# Altium PCB 0402保留.PcbDoc
Units mm, origin at the board's own origin, x right, y up, seen from the top; angles counter-clockwise.
Board outline 60.91 x 50 mm, 2 copper layers (Top Layer, Bottom Layer); 105 components, 73 nets, 380 pads, 0 vias.
Unrouted connection lines stored in the file: 234.
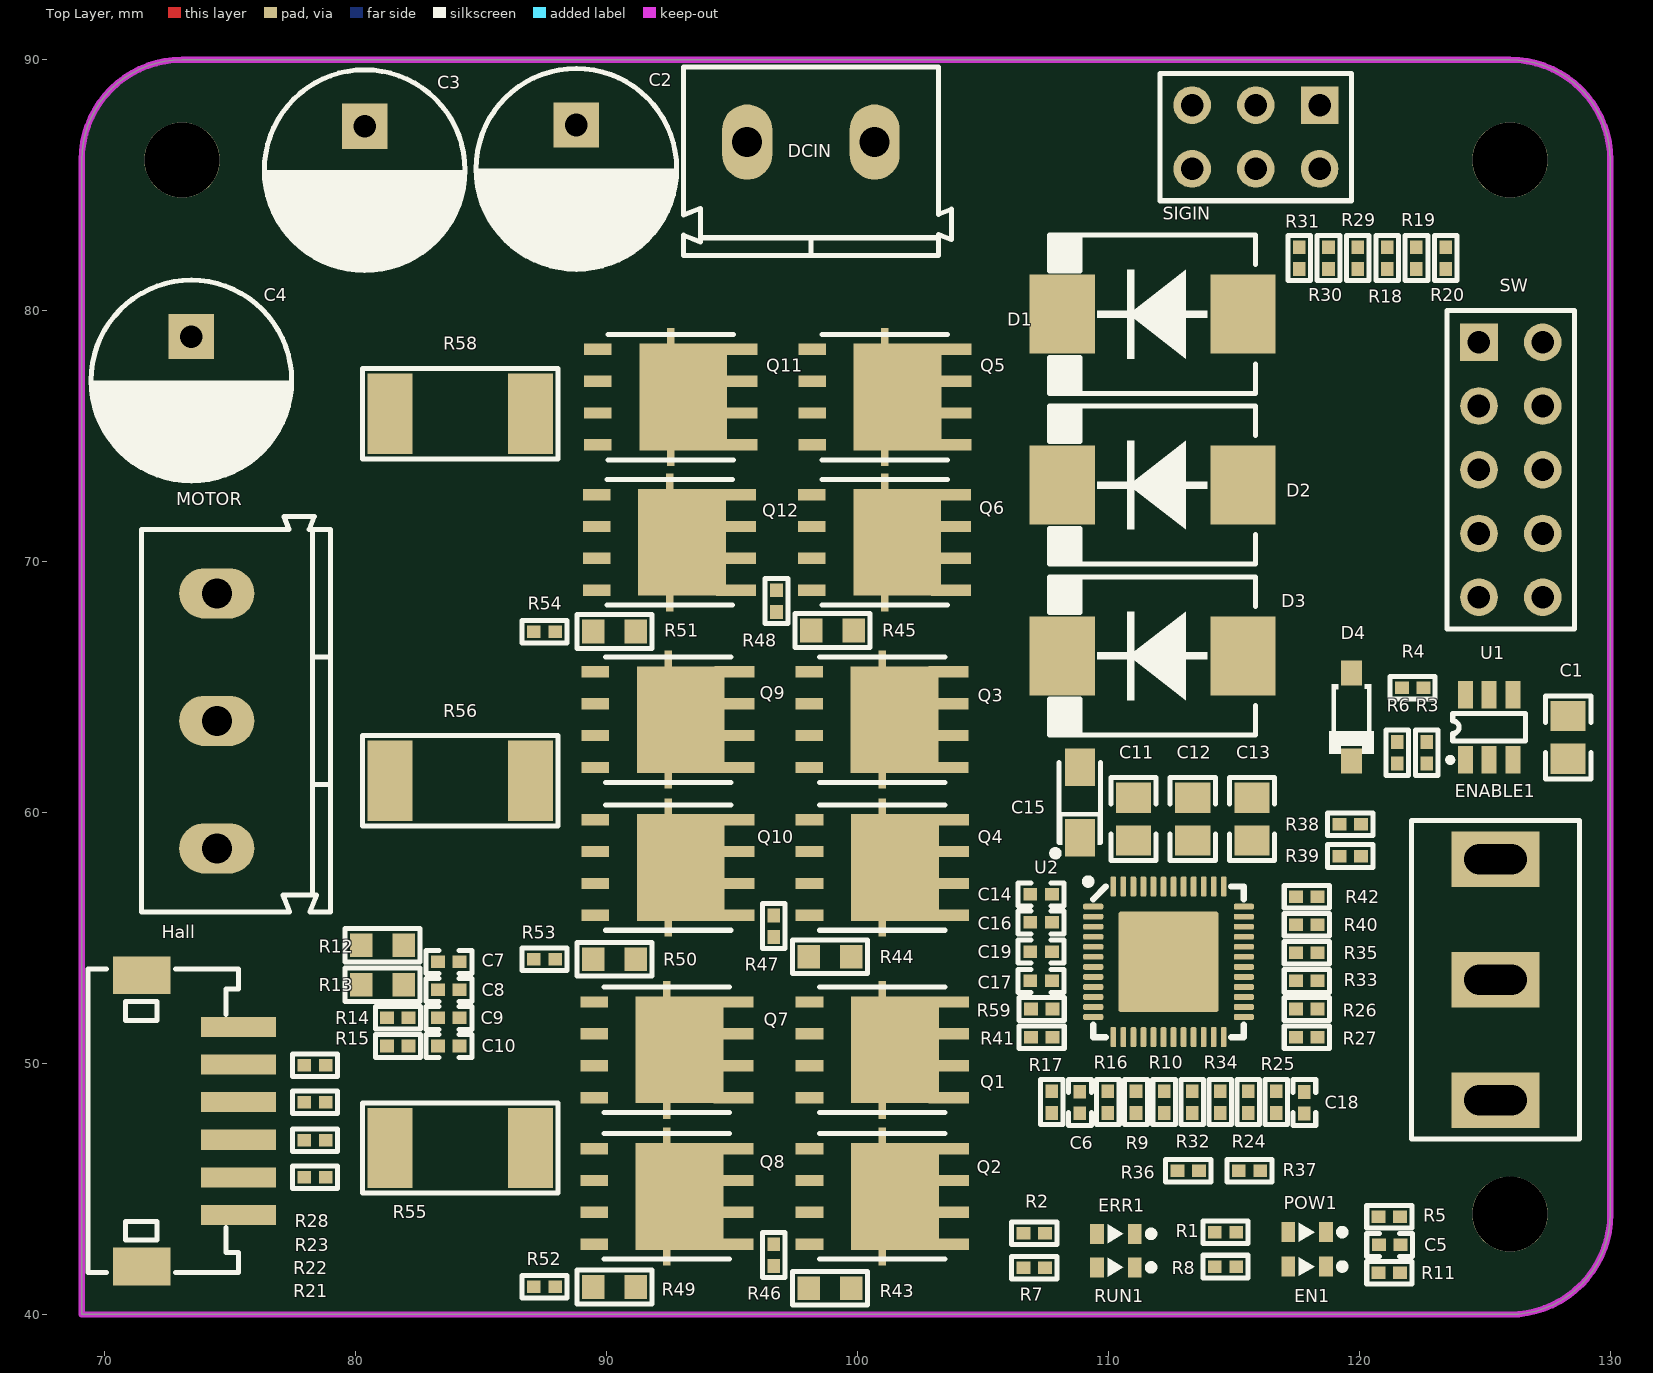
[diagram p0: Top Layer view]
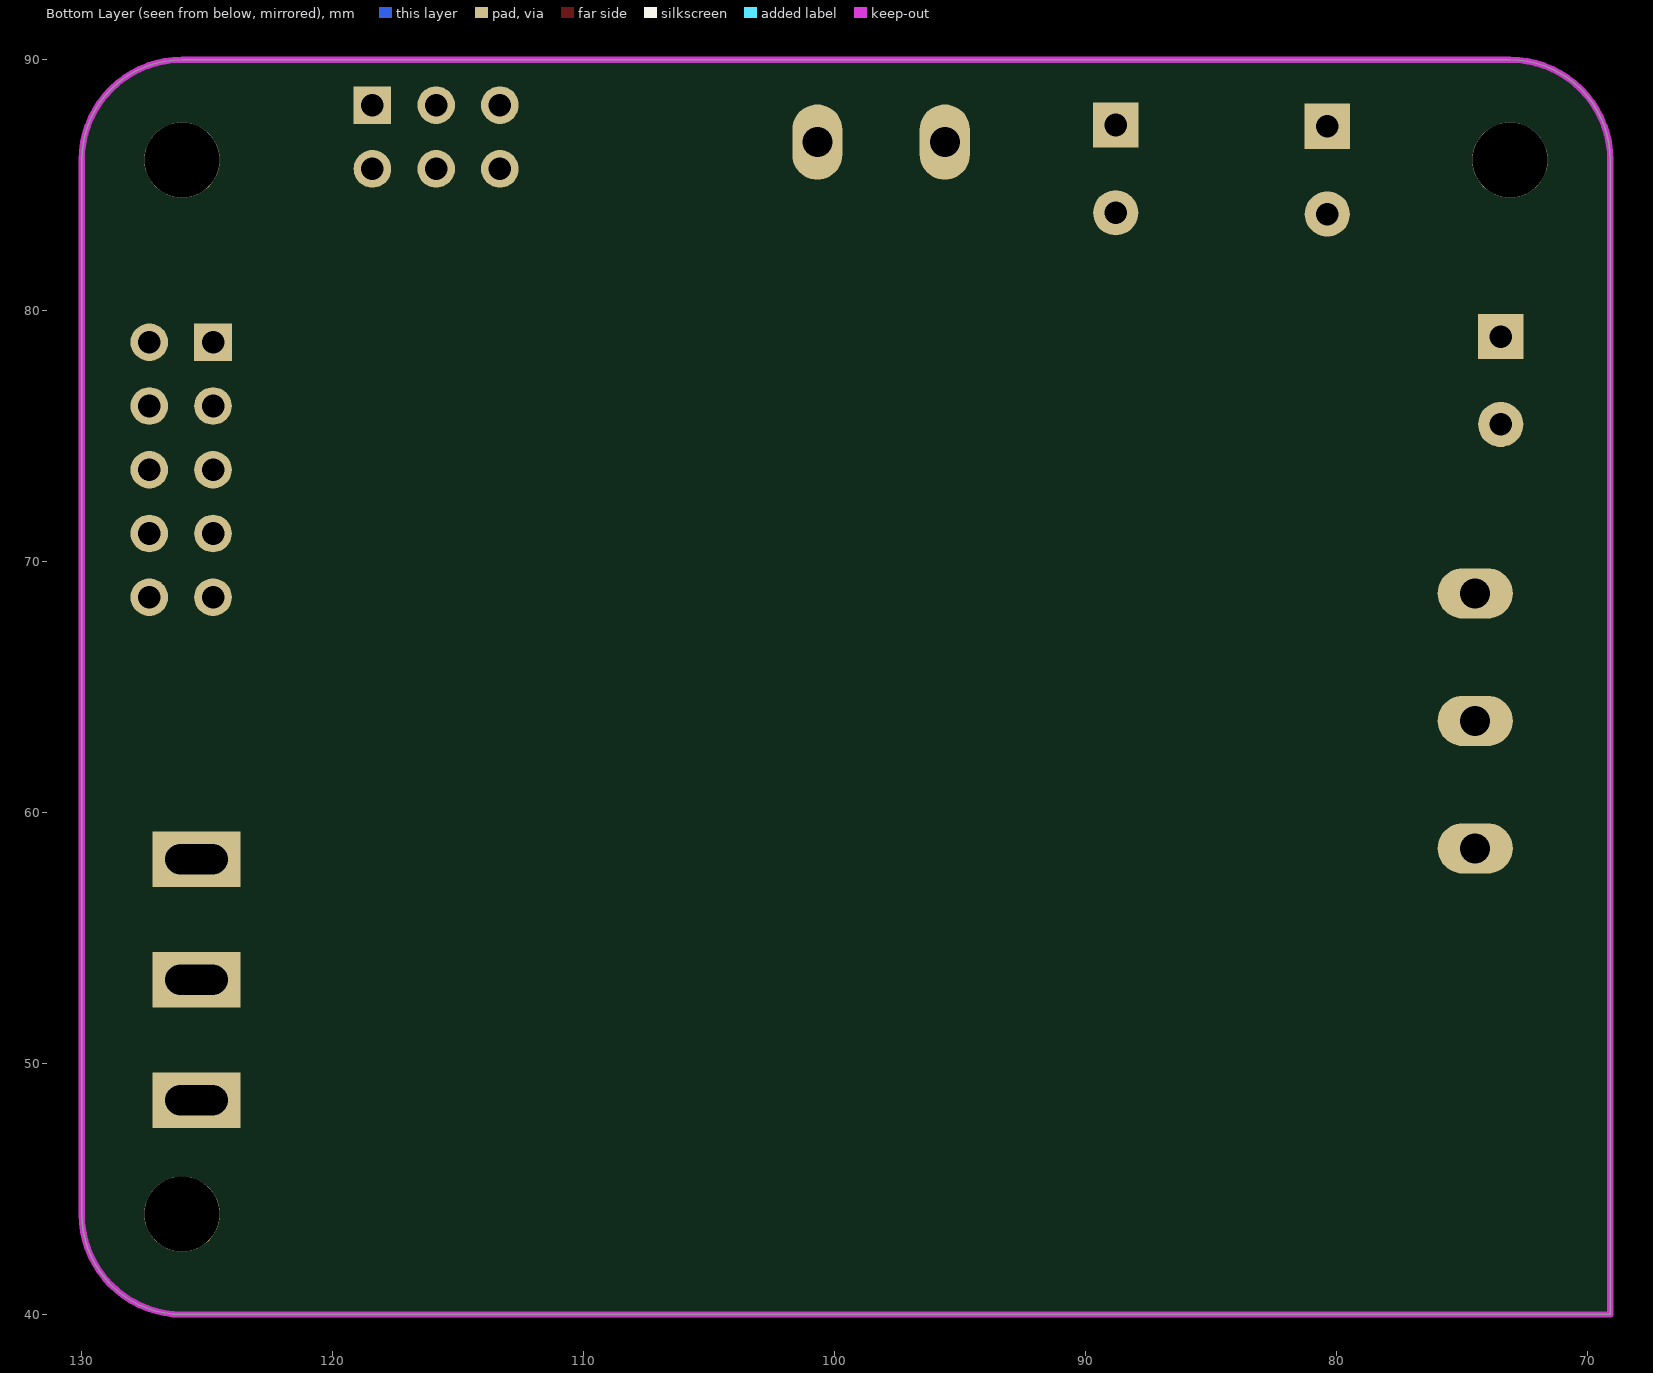
[diagram p1: Bottom Layer view, seen from below]

## Layer stack, top to bottom
Top Solder: solder mask 0.0102, Solder Resist, Dk 3.5
Top Layer: signal copper 0.0356
Dielectric 1: dielectric 0.32, FR-4, Dk 4.8
Bottom Layer: signal copper 0.0356
Bottom Solder: solder mask 0.0102, Solder Resist, Dk 3.5

## Board outline
69.088,40 126,40 ccw(c126,44) 130,44 130,86 ccw(c126,86) 126,90 73.088,90 ccw(c73.088,86) 69.088,86

## Design rules (kind name [scope] priority, off if disabled: settings)
Clearance [All] p1: gap=0.254 ignorepadtopadclearanceinfootprint=FALSE except(0.152: SMDPad-SMDPad)
PolygonConnect [All] p1: connectstyle=Relief reliefconductorwidth=0.254 reliefentries=4 polygonreliefangle="90 Angle" airgapwidth=0.254
RoutingVias [All] p1: holewidth=0.711 width=1.27 viastyle="Through Hole" minholewidth=0.711 minwidth=1.27 maxholewidth=0.711 maxwidth=1.27
SilkToSilkClearance [All] p1: silktosilkclearance=0.152
SilkToSolderMaskClearance [IsPad] p1: minsilkscreentomaskgap=0.152 clearancetoexposedcopper=TRUE
SolderMaskExpansion [All] p1: expansion=0.102
Width [All] p1: maxlimit=0.254 minlimit=0.254 preferedwidth=0.254
28 further rules are at their usual default settings.

## Components (designator, comment, footprint, x,y, rotation, side; value= is the part's Value field where it differs from the comment)
C1 "10uF ±10% 25V" CAPC2012[0805]S-N 128.321,62.992 r90 top value=10uF
C2 "470uF 25V" CAPPR3.5-8X12 88.798,85.649 r270 top value=470uF
C3 "470uF 25V" CAPPR3.5-8X12 80.366,85.598 r270 top value=470uF
C4 "470uF 25V" CAPPR3.5-8X12 73.457,77.216 r270 top value=470uF
C5 "100nF ±10% 50V" CAPC1005[0402]S-N 121.209,42.774 r180 top value=100nF
C6 "1uF ±10% 10V" CAPC1005[0402]S-N 108.864,48.449 r90 top value=1uF
C7 "100nF ±10% 50V" CAPC1005[0402]S-N 83.718,54.051 r180 top value=100nF
C8 "100nF ±10% 50V" CAPC1005[0402]S-N 83.718,52.934 r180 top value=100nF
C9 "100nF ±10% 50V" CAPC1005[0402]S-N 83.718,51.816 r180 top value=100nF
C10 "100nF ±10% 50V" CAPC1005[0402]S-N 83.718,50.698 r180 top value=100nF
C11 "10uF ±10% 25V" CAPC2012[0805]S-N 111,59.741 r90 top value=10uF
C12 "10uF ±10% 25V" CAPC2012[0805]S-N 113.361,59.741 r90 top value=10uF
C13 "10uF ±10% 25V" CAPC2012[0805]S-N 115.722,59.741 r90 top value=10uF
C14 "100nF ±10% 50V" CAPC1005[0402]S-N 107.317,56.736 r0 top value=100nF
C15 "10uF 16V" CAPT3216 108.864,60.401 r90 top value=10uF
C16 "100nF ±10% 50V" CAPC1005[0402]S-N 107.317,55.626 r0 top value=100nF
C17 "100nF ±10% 50V" CAPC1005[0402]S-N 107.317,53.289 r0 top value=100nF
C18 "100nF ±10% 50V" CAPC1005[0402]S-N 117.805,48.44 r90 top value=100nF
C19 "100nF ±10% 50V" CAPC1005[0402]S-N 107.317,54.458 r0 top value=100nF
D1 "SMDJ20CA" SMC[DO-214AB] 111.76,79.858 r180 top
D2 "SMDJ20CA" SMC[DO-214AB] 111.76,73.05 r180 top
D3 "SMDJ20CA" SMC[DO-214AB] 111.76,66.243 r180 top
D4 "1N5819" SOD-123-L 119.685,63.805 r270 top
DCIN "KF/WJ/DG 30x connecter" "KF/WJ/DG 301-2p-5.0mm" 98.146,86.716 r180 top
EN1 "蓝色贴片LED" LEDC1608(0603)-L 117.919,41.91 r180 top
ENABLE1 "SW-SPDT" SS12D10 125.425,53.34 r90 top
ERR1 "黄色贴片LED" LEDC1608(0603)-L 110.299,43.214 r180 top
Hall "Header 6" ZH1.5-WF-6P 75.336,47.713 r270 top
MOTOR "KF/WJ/DG 30x connecter" "KF/WJ/DG 301-3p-5.0mm" 74.473,63.652 r270 top
POW1 "红色贴片LED" LEDC1608(0603)-L 117.919,43.282 r180 top
Q1 "TPH1R403NL" DFN5x6 100.99,50.546 r270 top
Q2 "TPH1R403NL" DFN5x6 100.99,44.704 r270 top
Q3 "TPH1R403NL" DFN5x6 100.982,63.703 r270 top
Q4 "TPH1R403NL" DFN5x6 100.99,57.81 r270 top
Q5 "TPH1R403NL" DFN5x6 101.092,76.556 r270 top
Q6 "TPH1R403NL" DFN5x6 101.084,70.764 r270 top
Q7 "TPH1R403NL" DFN5x6 92.405,50.546 r270 top
Q8 "TPH1R403NL" DFN5x6 92.405,44.704 r270 top
Q9 "TPH1R403NL" DFN5x6 92.456,63.703 r270 top
Q10 "TPH1R403NL" DFN5x6 92.456,57.81 r270 top
Q11 "TPH1R403NL" DFN5x6 92.558,76.556 r270 top
Q12 "TPH1R403NL" DFN5x6 92.515,70.764 r270 top
R1 "20K ±1%" RESC1005[0402]S-N 114.668,43.282 r0 top value=20K
R2 "10K ±1%" RESC1005[0402]S-N 107.048,43.231 r0 top value=10K
R3 "1M ±1%" RESC1005[0402]S-N 122.682,62.382 r90 top value=1M
R4 "20K ±1%" RESC1005[0402]S-N 122.123,64.973 r0 top value=20K
R5 "30K ±1%" RESC1005[0402]S-N 121.194,43.891 r180 top value=30K
R6 "2K ±1%" RESC1005[0402]S-N 121.514,62.382 r270 top value=2K
R7 "10K ±1%" RESC1005[0402]S-N 107.048,41.859 r0 top value=10K
R8 "10K ±1%" RESC1005[0402]S-N 114.668,41.91 r0 top value=10K
R9 "1K ±1%" RESC1005[0402]S-N 111.1,48.463 r90 top value=1K
R10 "47K ±1%" RESC1005[0402]S-N 112.217,48.463 r270 top value=47K
R11 "10K ±1%" RESC1005[0402]S-N 121.194,41.656 r180 top value=10K
R12 "4.7K ±1%" RESC1608[0603]S-N 81.077,54.712 r180 top value=4.7K
R13 "4.7K ±1%" RESC1608[0603]S-N 81.077,53.137 r180 top value=4.7K
R14 "4.7K ±1%" RESC1005[0402]S-N 81.686,51.816 r180 top value=4.7K
R15 "4.7K ±1%" RESC1005[0402]S-N 81.686,50.698 r180 top value=4.7K
R16 "1K ±1%" RESC1005[0402]S-N 109.982,48.463 r90 top value=1K
R17 "10K ±1%" RESC1005[0402]S-N 107.747,48.463 r90 top value=10K
R18 "10K ±1%" RESC1005[0402]S-N 121.107,82.093 r270 top value=10K
R19 "100R ±1%" RESC1005[0402]S-N 122.276,82.093 r270 top value=100R
R20 "100R ±1%" RESC1005[0402]S-N 123.444,82.093 r270 top value=100R
R21 "100R ±1%" RESC1005[0402]S-N 78.384,45.466 r180 top value=100R
R22 "100R ±1%" RESC1005[0402]S-N 78.384,46.939 r180 top value=100R
R23 "100R ±1%" RESC1005[0402]S-N 78.384,48.463 r180 top value=100R
R24 "1K ±1%" RESC1005[0402]S-N 115.57,48.463 r90 top value=1K
R25 "100K ±1%" RESC1005[0402]S-N 116.688,48.463 r270 top value=100K
R26 "1K ±1%" RESC1005[0402]S-N 117.907,52.172 r180 top value=1K
R27 "100K ±1%" RESC1005[0402]S-N 117.907,51.054 r0 top value=100K
R28 "100R ±1%" RESC1005[0402]S-N 78.384,49.936 r180 top value=100R
R29 "10K ±1%" RESC1005[0402]S-N 119.939,82.093 r90 top value=10K
R30 "100R ±1%" RESC1005[0402]S-N 118.77,82.093 r90 top value=100R
R31 "100R ±1%" RESC1005[0402]S-N 117.602,82.093 r270 top value=100R
R32 "1K ±1%" RESC1005[0402]S-N 113.335,48.463 r90 top value=1K
R33 "1K ±1%" RESC1005[0402]S-N 117.907,53.289 r180 top value=1K
R34 "100K ±1%" RESC1005[0402]S-N 114.452,48.463 r90 top value=100K
R35 "100K ±1%" RESC1005[0402]S-N 117.907,54.407 r180 top value=100K
R36 "10K ±1%" RESC1005[0402]S-N 113.182,45.72 r0 top value=10K
R37 "10K ±1%" RESC1005[0402]S-N 115.621,45.72 r0 top value=10K
R38 "10K ±1%" RESC1005[0402]S-N 119.634,59.538 r180 top value=10K
R39 "10K ±1%" RESC1005[0402]S-N 119.634,58.268 r0 top value=10K
R40 "1K ±1%" RESC1005[0402]S-N 117.907,55.524 r0 top value=1K
R41 "100R ±1%" RESC1005[0402]S-N 107.34,51.054 r180 top value=100R
R42 "1K ±1%" RESC1005[0402]S-N 117.907,56.642 r0 top value=1K
R43 "4R7 ±1%" RESC1608[0603]S-N 98.908,41.046 r180 top value=4R7
R44 "4R7 ±1%" RESC1608[0603]S-N 98.908,54.254 r180 top value=4R7
R45 "4R7 ±1%" RESC1608[0603]S-N 99.009,67.259 r180 top value=4R7
R46 "10K ±1%" RESC1005[0402]S-N 96.672,42.367 r270 top value=10K
R47 "10K ±1%" RESC1005[0402]S-N 96.672,55.474 r270 top value=10K
R48 "10K ±1%" RESC1005[0402]S-N 96.774,68.428 r270 top value=10K
R49 "4R7 ±1%" RESC1608[0603]S-N 90.322,41.097 r180 top value=4R7
R50 "4R7 ±1%" RESC1608[0603]S-N 90.322,54.153 r180 top value=4R7
R51 "4R7 ±1%" RESC1608[0603]S-N 90.322,67.208 r180 top value=4R7
R52 "10K ±1%" RESC1005[0402]S-N 87.528,41.097 r0 top value=10K
R53 "10K ±1%" RESC1005[0402]S-N 87.528,54.153 r0 top value=10K
R54 "10K ±1%" RESC1005[0402]S-N 87.528,67.208 r0 top value=10K
R55 "2mR ±1%" RESC6332[2512]S 84.176,46.634 r0 top value=2mR
R56 "2mR ±1%" RESC6332[2512]S 84.176,61.265 r0 top value=2mR
R58 "2mR ±1%" RESC6332[2512]S 84.176,75.895 r0 top value=2mR
R59 "10K ±1%" RESC1005[0402]S-N 107.34,52.172 r0 top value=10K
RUN1 "翠绿贴片LED" LEDC1608(0603)-L 110.299,41.876 r180 top
SIGIN "Header 3X2" HDR2X3 118.415,88.189 r180 top
SW "Header 5X2" HDR2X5 124.765,78.74 r270 top
U1 "ETA7014" SOT-23-6 125.171,63.398 r90 top
U2 "MM32SPIN360C" QFN48-6x6 112.395,54.051 r0 top

## Footprints (in the part's own frame and the unit in brackets; to place one, negate y for a bottom-side part, rotate by r counter-clockwise, add the part's x,y. Pads: shape width x height; smd on the part's side, far side on the other; paste and mask are expansions set on the pad)
CAPC1005[0402]S-N [mm]
  rect 0.55x0.5 smd: 1(-0.43,0) 2(0.43,0)
  silkscreen extent -0.91,-0.46 0.91,0.46, body extent -0.5,-0.25 0.5,0.25, height 0.5
CAPC2012[0805]S-N [mm]
  rect 1.2x1.4 smd: 1(-0.85,0) 2(0.85,0)
  silkscreen extent -1.65,-0.9 1.65,0.9, body extent -1,-0.63 1,0.62, height 1.25
CAPPR3.5-8X12 [mm]
  rect 1.8x1.8 hole 0.9: 1(-1.75,0)
  round 1.8 hole 0.9: 2(1.75,0)
  silkscreen extent -4,-4.01 4,4, body extent -4,-4 4,4, height 12
CAPT3216 [mm]
  rect 1.5x1.2 smd: 1(-1.4,0) 2(1.4,0)
  silkscreen extent -2.15,-0.9 1.6,1.1, body extent -1.6,-0.8 1.6,0.8, height 1.6
DFN5x6 [mm]
  rect 0.45x1.6 smd: 1(-1.905,2.65) 1(-0.635,2.65) 1(0.635,2.65) 1(1.905,2.65)
  rect 5.5x0.3 smd: 1(0,0)
  rect 4.25x3.5 smd: 1(0,0.5)
  rect 0.45x1.1 smd: 2(1.905,-2.9) 3(-1.905,-2.9) 3(-0.635,-2.9) 3(0.635,-2.9)
  silkscreen extent -2.5,-2.5 2.5,2.5, body extent -2.45,-3 2.45,3, height 1
HDR2X3 [mm]
  rect 1.5x1.5 hole 0.9: 1(0,0)
  round 1.5 hole 0.9: 2(0,2.54) 3(2.54,0) 4(2.54,2.54) 5(5.08,0) 6(5.08,2.54)
  silkscreen extent -1.27,-1.27 6.35,3.81, body extent -1.27,-1.27 6.35,3.81, height 8.54
HDR2X5 [mm]
  rect 1.5x1.5 hole 0.9: 1(0,0)
  round 1.5 hole 0.9: 2(0,2.54) 3(2.54,0) 4(2.54,2.54) 5(5.08,0) 6(5.08,2.54) 7(7.62,0) 8(7.62,2.54) 9(10.16,0) 10(10.16,2.54)
  silkscreen extent -1.27,-1.27 11.43,3.81, body extent -1.27,-1.27 11.43,3.81, height 8.54
"KF/WJ/DG 301-2p-5.0mm" [mm]
  oval 2x3 hole 1.2: 1(2.54,0) 2(-2.54,0)
  silkscreen extent -5.6,-3 5.08,4.52, body extent -5.6,-3 5,4.6, height 10
"KF/WJ/DG 301-3p-5.0mm" [mm]
  oval 2x3 hole 1.2: 1(5.08,0) 2(0,0) 3(-5.08,0)
  silkscreen extent -8.14,-3 7.62,4.52, body extent -8.27,-5.26 7.57,5.24, height 14.35
LEDC1608(0603)-L [mm]
  rect 0.55x0.8 smd: A(0.75,0) C(-0.75,0)
  silkscreen extent -1.53,-0.38 0.33,0.38, body extent -0.8,-0.4 0.8,0.4, height 0.64
QFN48-6x6 [mm]
  rrect5% 4x4 smd paste+0 mask+0.05: 0(0,0)
  rrect50% 0.8x0.23 smd paste+0 mask+0.05: 1(-3,2.2) 2(-3,1.8) 3(-3,1.4) 4(-3,1) 5(-3,0.6) 6(-3,0.2) 7(-3,-0.2) 8(-3,-0.6) 9(-3,-1) 10(-3,-1.4) 11(-3,-1.8) 12(-3,-2.2) 25(3,-2.2) 26(3,-1.8) 27(3,-1.4) 28(3,-1) 29(3,-0.6) 30(3,-0.2) 31(3,0.2) 32(3,0.6) 33(3,1) 34(3,1.4) 35(3,1.8) 36(3,2.2)
  rrect50% 0.23x0.8 smd paste+0 mask+0.05: 13(-2.2,-3) 14(-1.8,-3) 15(-1.4,-3) 16(-1,-3) 17(-0.6,-3) 18(-0.2,-3) 19(0.2,-3) 20(0.6,-3) 21(1,-3) 22(1.4,-3) 23(1.8,-3) 24(2.2,-3) 37(2.2,3) 38(1.8,3) 39(1.4,3) 40(1,3) 41(0.6,3) 42(0.2,3) 43(-0.2,3) 44(-0.6,3) 45(-1,3) 46(-1.4,3) 47(-1.8,3) 48(-2.2,3)
  silkscreen extent -3.32,-3 3,3.32, body extent -3.02,-3.02 3.02,3.02, height 0.65
RESC1005[0402]S-N [mm]
  rect 0.55x0.5 smd: 1(-0.43,0) 2(0.43,0)
  silkscreen extent -0.9,-0.45 0.9,0.45, body extent -0.5,-0.25 0.5,0.25, height 0.35
RESC1608[0603]S-N [mm]
  rect 0.9x0.95 smd: 1(-0.85,0) 2(0.85,0)
  silkscreen extent -1.5,-0.67 1.5,0.67, body extent -0.8,-0.4 0.8,0.4, height 0.45
RESC6332[2512]S [mm]
  rect 1.8x3.2 smd: 1(-2.8,0) 2(2.8,0)
  silkscreen extent -3.9,-1.8 3.9,1.8, body extent -3.22,-1.68 3.22,1.68, height 0.71
SMC[DO-214AB] [mm]
  rect 2.6x3.15 smd: A(-3.6,0) K(3.6,0)
  silkscreen extent -4.1,-3.15 4.1,3.15, body extent -4.17,-3.11 4.18,3.11, height 2.3
SOD-123-L [mm]
  rect 1x0.85 smd: A(-1.75,0) K(1.75,0)
  silkscreen extent -1.32,-0.9 1.48,0.9, body extent -1.85,-0.8 1.85,0.8, height 1.2
SOT-23-6 [mm]
  rect 1.1x0.6 smd: 1(-1.3,0.95) 2(-1.3,0) 3(-1.3,-0.95) 4(1.3,-0.95) 5(1.3,0) 6(1.3,0.95)
  silkscreen extent -1.37,-1.45 0.55,1.62, body extent -1.5,-1.5 1.5,1.5, height 1.55
SS12D10 [mm]
  rect 2.2x3.5 hole 1.2 slot 2.5 at 90 deg mask+0.07: 1(-4.8,0) 2(0,0) 3(4.8,0)
  silkscreen extent -6.35,-3.35 6.35,3.35, body extent -6.4,-3.3 6.35,3.8, height 12.5
ZH1.5-WF-6P [mm]
  rect 1.5x2.3 smd: 0(-5.8,-3.85) 0(5.8,-3.85)
  rect 0.8x3 smd: 1(-3.75,0) 2(-2.25,0) 3(-0.75,0) 4(0.75,0) 5(2.25,0) 6(3.75,0)
  silkscreen extent -6.05,-6 6.05,0, body extent -6.29,-6 6.29,0.71, height 3.9

## Part data
C1 C11 C12 C13: library part Cap-Chip, "贴片电容", Tolerance=±10%, Voltage=25V, Published=2020-12-18, Revision=V1.1
C2 C3 C4: library part Cap-Elect, "Polarized Capacitor (Radial)", Voltage=25V, Price(RMB)=0.000, Published=8-Jun-2000, Publisher="Altium Limited", Revision="July-2002: Re-released for DXP Platform."
C5 C7 C8 C9 C10 C14 C16 C17 C18 C19: library part Cap-Chip_1, "贴片电容", Tolerance=±10%, Voltage=50V, Published=2020-12-18, Revision=V1.1
C6: library part Cap-Chip_2, "贴片电容", Tolerance=±10%, Voltage=10V, Published=2020-12-18, Revision=V1.1
C15: library part Cap-Tan, "Tantalum Capacitor", Voltage=16V, Price(RMB)=0.000, Published=8-Jun-2000, Publisher="Altium Limited", Revision="July-2002: Re-released for DXP Platform."
D1 D2 D3: library part "Diode TVS Bi-Dir", "TRANSIENT VOLTAGE  SUPPRESSOR DIODE", Imax=500mA, Price(RMB)=0.000, Published=8-Jun-2000, Publisher="Altium Limited"
D4: library part Diode, "普通二极管 Diode", Imax=500mA, Price(RMB)=0.000, Published=8-Jun-2000, Publisher="Altium Limited", Revision="July-2002: Re-released for DXP Platform."
DCIN: library part "KF/WJ/DG 30x", "接线端子 2Pin"
EN1: library part "LED Chip Blue", Color=Blue, Price(RMB)=0.00, Published=8-Jun-2000, Publisher="Altium Limited", Revision="July-2002: Re-released for DXP Platform."
ENABLE1: "单刀双掷开关 3脚船型、钮子、拨动开关 SPDT Subminiature Toggle Switch"
ERR1: library part "LED Chip Yellow", Price(RMB)=0.00, Published=8-Jun-2000, Publisher="Altium Limited", Revision="July-2002: Re-released for DXP Platform."
Hall: "Header, 6-Pin", LatestRevisionDate=17-Jul-2002, LatestRevisionNote="Re-released for DXP Platform.", Price(RMB)=0.00, Publisher="Altium Limited"
MOTOR: library part "KF/WJ/DG 30x-3P", "接线端子 3Pin"
POW1: library part "LED Chip Red", Price(RMB)=0.00, Published=8-Jun-2000, Publisher="Altium Limited", Revision="July-2002: Re-released for DXP Platform."
Q1 Q2 Q3 Q4 Q5 Q6 Q7 Q8 Q9 Q10 Q11 Q12: "东芝 N沟 MOS"
R1 R4: library part Res-Chip_2, "贴片电阻", Tolerance=±1%, Published=8-Jun-2000, Revision="July-2002: Re-released for DXP Platform."
R2 R7 R8 R11 R17 R18 R29 R36 R37 R38 R39 R46 R47 R48 R52 R53 R54 R59: library part Res-Chip, "贴片电阻", Tolerance=±1%, Published=8-Jun-2000, Revision="July-2002: Re-released for DXP Platform."
R3: library part Res-Chip_6, "贴片电阻", Tolerance=±1%, Published=8-Jun-2000, Revision="July-2002: Re-released for DXP Platform."
R5: library part Res-Chip_1, "贴片电阻", Tolerance=±1%, Published=8-Jun-2000, Revision="July-2002: Re-released for DXP Platform."
R6: library part Res-Chip_9, "贴片电阻", Tolerance=±1%, Published=8-Jun-2000, Revision="July-2002: Re-released for DXP Platform."
R9 R16 R24 R26 R32 R33 R40 R42: library part Res-Chip_3, "贴片电阻", Tolerance=±1%, Published=8-Jun-2000, Revision="July-2002: Re-released for DXP Platform."
R10: library part Res-Chip_4, "贴片电阻", Tolerance=±1%, Published=8-Jun-2000, Revision="July-2002: Re-released for DXP Platform."
R12 R13 R14 R15: library part Res-Chip_7, "贴片电阻", Tolerance=±1%, Published=8-Jun-2000, Revision="July-2002: Re-released for DXP Platform."
R19 R20 R21 R22 R23 R28 R30 R31 R41: library part Res-Chip_8, "贴片电阻", Tolerance=±1%, Published=8-Jun-2000, Revision="July-2002: Re-released for DXP Platform."
R25 R27 R34 R35: library part Res-Chip_5, "贴片电阻", Tolerance=±1%, Published=8-Jun-2000, Revision="July-2002: Re-released for DXP Platform."
R43 R44 R45 R49 R50 R51: library part Res-Chip_10, "贴片电阻", Tolerance=±1%, Published=8-Jun-2000, Revision="July-2002: Re-released for DXP Platform."
R55 R56 R58: library part Res-Chip_11, "贴片电阻", Tolerance=±1%, Published=8-Jun-2000, Revision="July-2002: Re-released for DXP Platform."
RUN1: library part "LED Chip Green", Price(RMB)=0.00, Published=8-Jun-2000, Publisher="Altium Limited", Revision="July-2002: Re-released for DXP Platform."
SIGIN: "Header, 3-Pin, Dual row", LatestRevisionDate=17-Jul-2002, LatestRevisionNote="Re-released for DXP Platform.", Price(RMB)=0.00, Publisher="Altium Limited"
SW: "Header, 5-Pin, Dual row", LatestRevisionDate=17-Jul-2002, LatestRevisionNote="Re-released for DXP Platform.", Price(RMB)=0.00, Publisher="Altium Limited"
U1: "ETA7014 OVPоƬ"
U2: ComponentLink1Description="Manufacturer Link", ComponentLink1URL=www.st.com/stm32, ComponentLink2Description=Datasheet, ComponentLink2URL=http://www.st.com/stonline/products/literature/ds/13587.pdf, DatasheetVersion="rev6, Mar-2008", PackageDescription="48-Pin Low-Profile Quad Flat Pack, 7 x 7 mm Body, 0.5 mm Pitch (LQFP48)", PackageReference=LQFP48, PackageVersion=Mar-2008, Published=30-May-2008, Publisher="Altium Limited"

## Free pads (board coordinates)
  round 3 hole 3 unplated: 0(73.088,86) 0(126,44) 0(126,86)

## Nets (pads, with @x,y where several pads share a name; then routed paths per layer and width w, separated by ;. In a path a pad name is that pad's centre, name@x,y a point inside that pad or via, vN(x,y) a via of type N, cw(c..) or ccw(c..) an arc to the next point about the centre after c; other vN are vias at no path point)
A0: C9.2 R14.1 R22.1 U2.10
A1: C8.2 R13.1 R23.1 U2.11
A2: C7.2 R12.1 R28.1 U2.12
A3: C6.2 R17.2 R41.1 U2.13
A4: R16.2 U2.14
A5: R9.2 R10.1 U2.15
A6: R10.2 R17.1 U2.16
A7: R21.1 U2.17
A9: R18.2 R19.2 U2.29
A10: R29.1 R30.1 U2.30
A11: R42.1 U2.31
A12: R31.2 U2.32
B0: R32.2 R34.2 U2.18
B1: R24.2 R25.1 U2.19
B2: R25.2 U2.20
B10: R27.2 U2.21
B11: R26.2 R27.1 U2.22
B12: R33.2 R35.2 U2.25
B13: EN1.C U2.26
B14: R40.1 U2.27
B15: C5.2 R5.2 R11.2 U2.28
C14: ERR1.C U2.4
C15: RUN1.C U2.5
D2: R20.2 U2.34
D3: R41.2 U2.35
GND: C1.2 C2.2 C3.2 C4.2 C5.1 C6.1 C7.1 C8.1 C9.1 C10.1 C14.1 C15.2 C16.1 C17.1 C18.1 C19.1 D1.A D2.A D3.A DCIN.2 ENABLE1.1 Hall.1 POW1.C R6.2 R9.1 R11.1 R18.1 R29.2 R37.2 R39.2 R58.1 SIGIN.3 SIGIN.4 SW.3 SW.5 U1.6 U2.0 U2.1 U2.24
HOA: R43.1 U2.47
HOB: R44.1 U2.43
HOC: R45.1 U2.39
IA: Q7.3 Q8.3 R32.1 R52.1 R55.2
IB: Q9.3 Q10.3 R33.1 R53.1 R56.2
ISUM: Q11.3 Q12.3 R16.1 R24.1 R26.1 R54.1 R55.1 R56.1 R58.2
LOA: R49.1 U2.45
LOB: R50.1 U2.41
LOC: R51.1 U2.37
NetC10_2: C10.2 Hall.5 R15.1 R21.2
NetC11_1: C11.1 U2.48
NetC12_1: C12.1 U2.44
NetC13_1: C13.1 U2.40
NetD4_A: D4.A SW.1
NetEN1_A: EN1.A R8.2
NetENABLE1_2: ENABLE1.2 R40.2 R42.2
NetERR1_A: ERR1.A R2.2
NetHall_2: Hall.2 R28.2
NetHall_3: Hall.3 R23.2
NetHall_4: Hall.4 R22.2
NetPOW1_A: POW1.A R1.2
NetQ1_2: Q1.2 Q2.2 R43.2 R46.2
NetQ3_2: Q3.2 Q4.2 R44.2 R47.2
NetQ5_2: Q5.2 Q6.2 R45.2 R48.2
NetQ7_2: Q7.2 Q8.2 R49.2 R52.2
NetQ9_2: Q9.2 Q10.2 R50.2 R53.2
NetQ11_2: Q11.2 Q12.2 R51.2 R54.2
NetR3_1: R3.1 U1.2
NetR4_1: R4.1 R6.1 U1.1
NetR7_2: R7.2 RUN1.A
NetR19_1: R19.1 SIGIN.1
NetR20_1: R20.1 SIGIN.2
NetR30_2: R30.2 SIGIN.5
NetR31_1: R31.1 SIGIN.6
NetR34_1: R34.1 R36.2 R37.1
NetR35_1: R35.1 R38.2 R39.1
RST: C19.2 R59.1 SW.10 U2.8
RX: SW.9 U2.7
SWCLK: SW.4 U2.36
SWDIO: SW.2 U2.33
TX: SW.7 U2.6
VCC5V: C15.1 C16.2 C17.2 C18.2 D4.K ENABLE1.3 Hall.6 R1.1 R2.1 R7.1 R8.1 R12.2 R13.2 R14.2 R15.2 R36.1 R38.1 R59.2 U2.3 U2.9 U2.23
VCC12V: C2.1 C3.1 C4.1 D1.K D2.K D3.K DCIN.1 Q1.1 Q2.1 Q3.1 Q4.1 Q5.1 Q6.1 R3.2 R4.2 U1.4 U1.5
VCC12VO: C1.1 C14.2 R5.1 U1.3 U2.2
VSA: C11.2 MOTOR.1 Q1.3 Q2.3 Q7.1 Q8.1 R46.1 U2.46
VSB: C12.2 MOTOR.2 Q3.3 Q4.3 Q9.1 Q10.1 R47.1 U2.42
VSC: C13.2 MOTOR.3 Q5.3 Q6.3 Q11.1 Q12.1 R48.1 U2.38
pads on no net: Hall.0 SW.6 SW.8

## Keep-outs
Keep-Out Layer:
  the board outline again, w0.254